# EAGLE board Schematic_-_Ebook_Reader_vFinal_v58 (EAGLE 9.7.0)
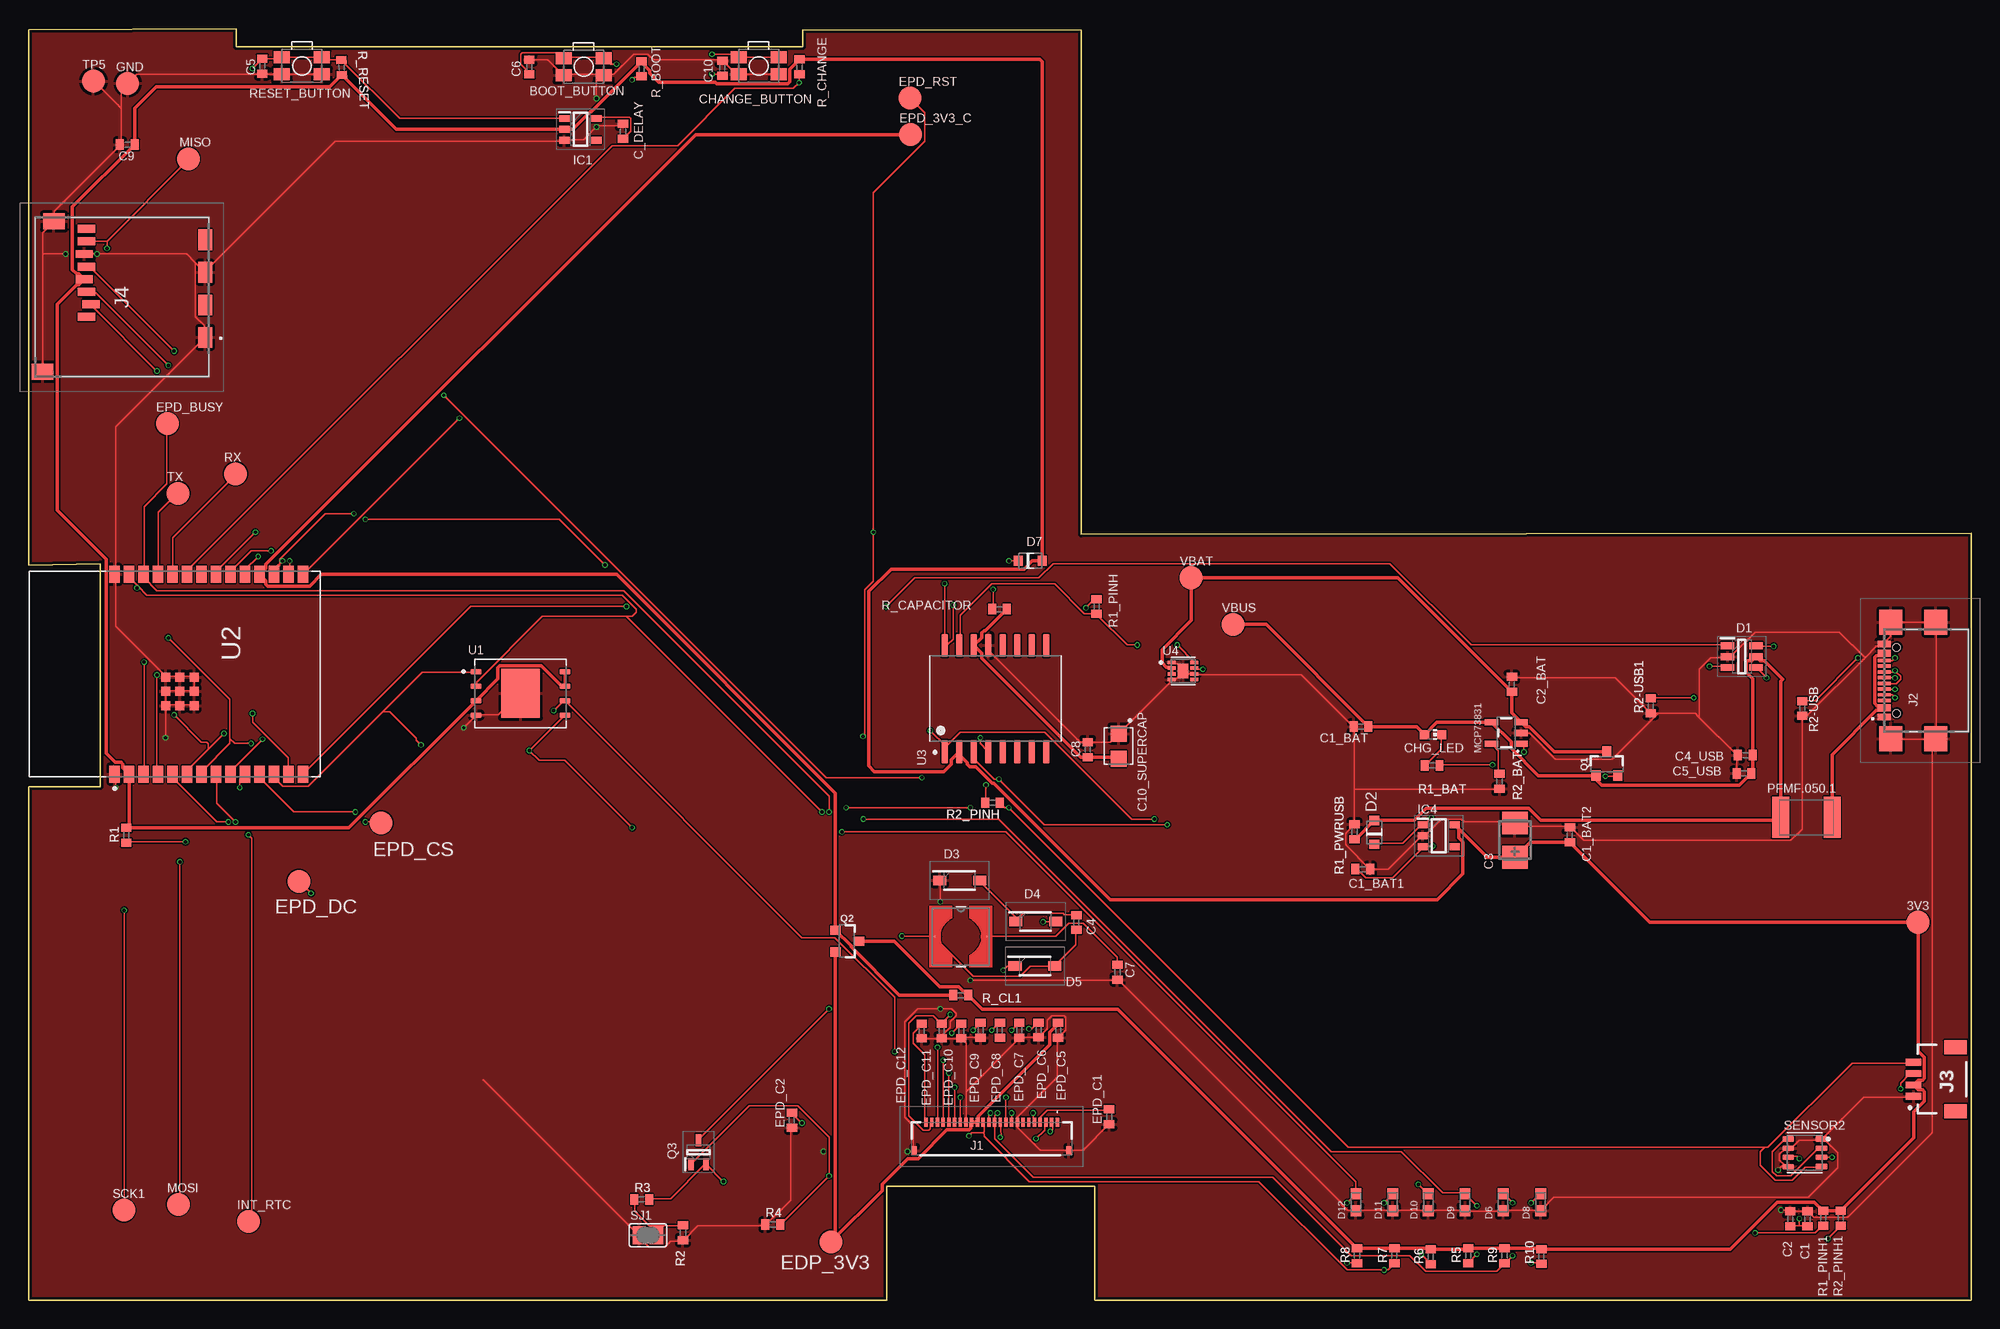
[diagram p0: board, top side]
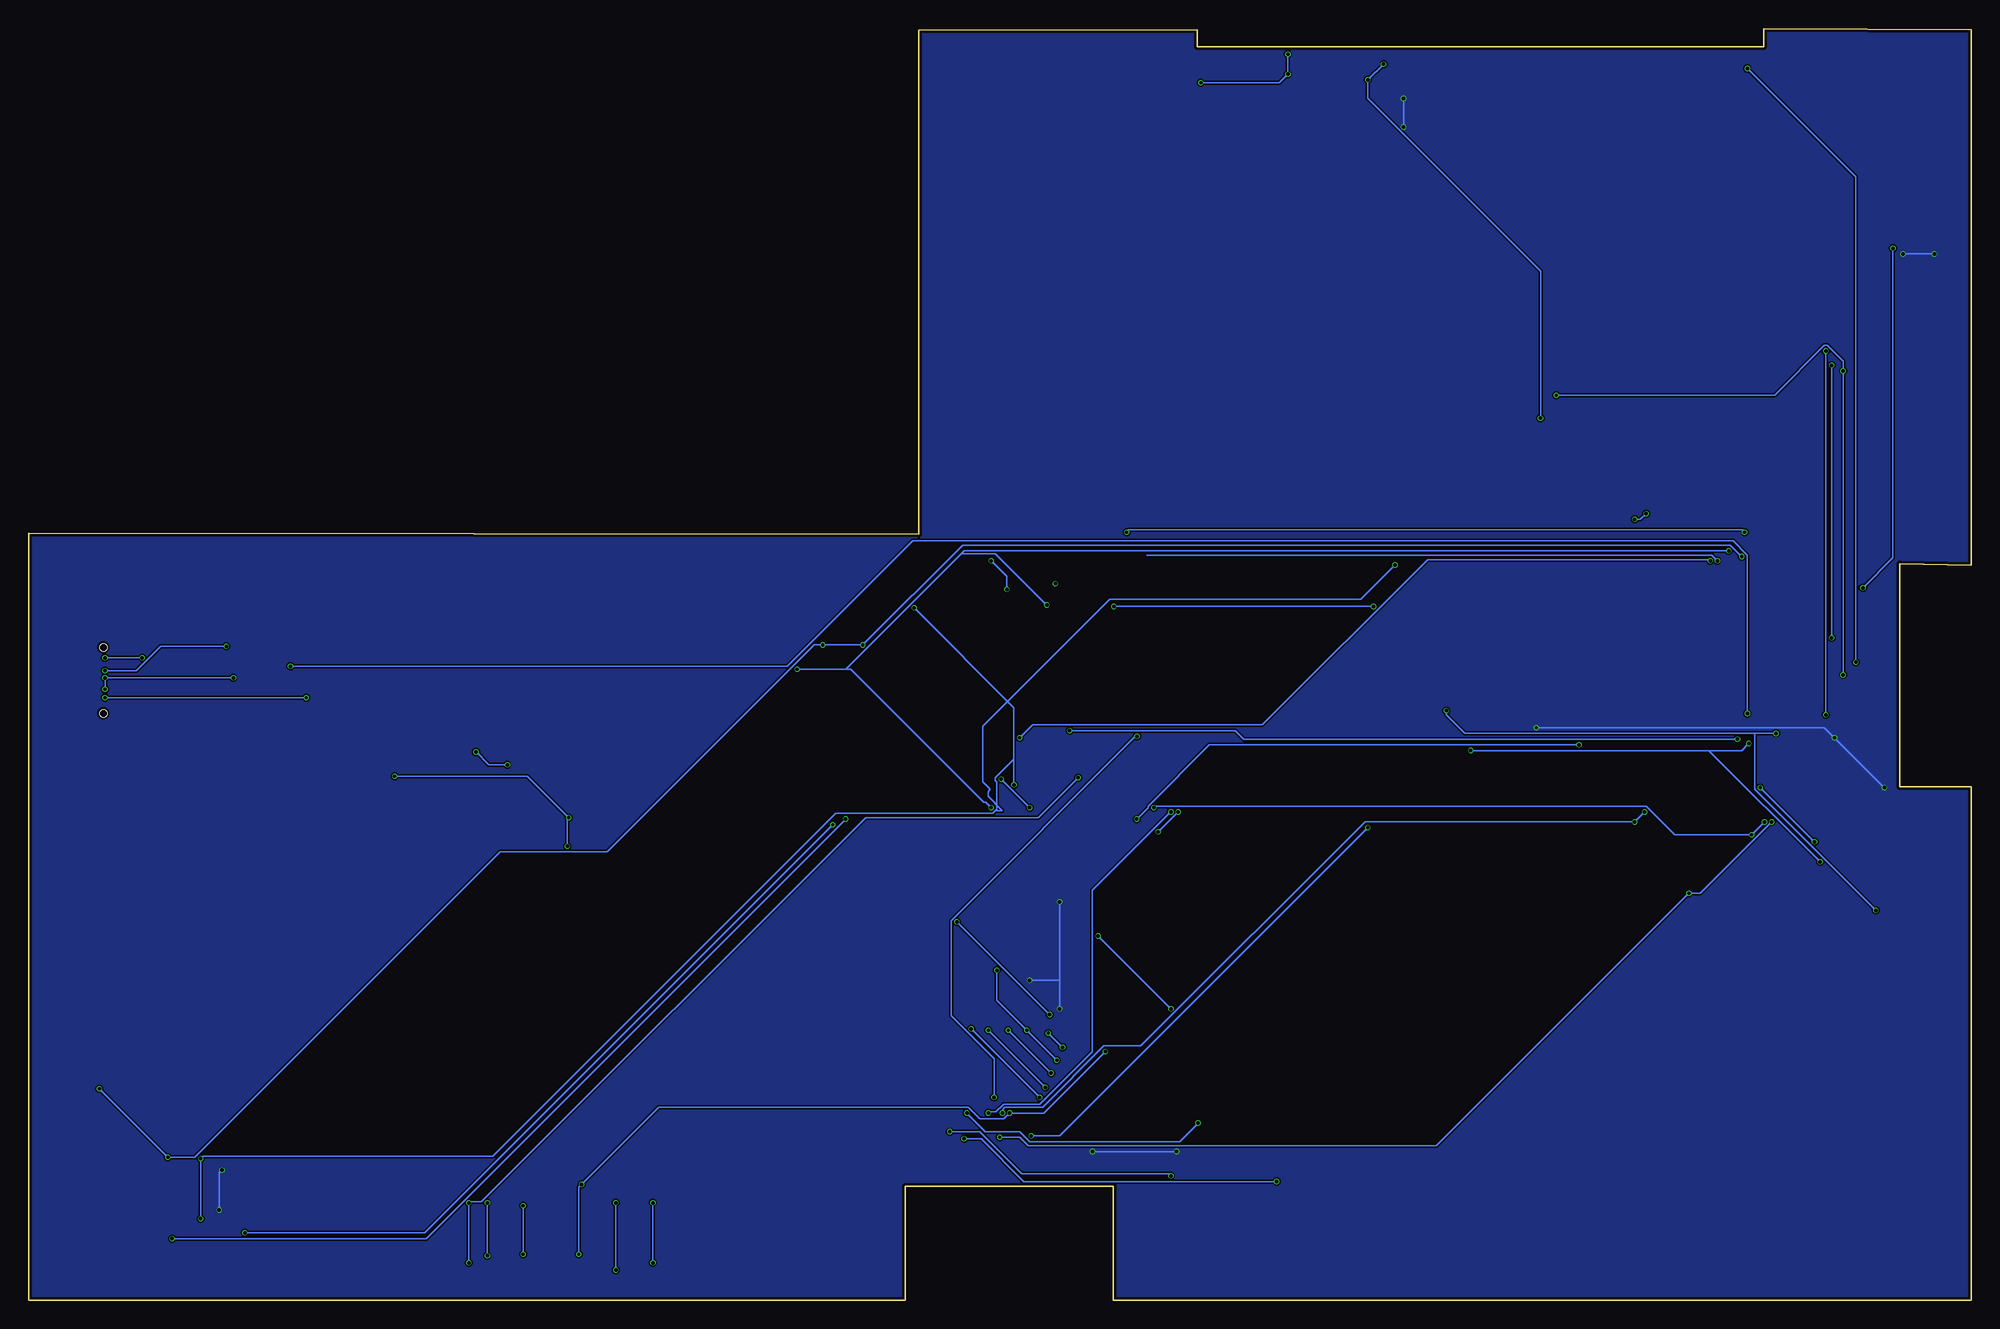
[diagram p1: board, bottom side, seen from below]

Size 170.2 x 111.4 mm. Coordinates in mm from the lower left corner, seen from the top.
Outline: 92.2,111.25 67.8,111.29 67.8,109.8 18.2,109.8 18.2,111.4 0,111.3 0,64.4 6.3,64.5 6.3,44.97 0,44.97 0,0 75.2,0 75.2,10 93.4,10 93.4,0 170.2,0 170.2,67.2 92.2,67.1 92.2,111.25
Copper layers (1*16): Top 0.035mm / dielectric 1.6mm / Bottom 0.035mm
Design rules "jlcpcb-2layers.dru *": minimum track width 5mil, minimum drill 0.3mm, track to track 5mil, track to pad 5mil, pad to pad 5mil, via to via 5mil, smd to smd 5mil, copper to edge 0.2mm, drill to drill 6mil, minimum pad ring 10mil, minimum via ring 3mil, stop-mask expansion 4mil, vias tented up to drill 0mil, thermal gap 10mil
Net classes: 0 default: width 0.15 mm; 1 POWER: width 0.3 mm

## Footprints (pad centres in the part's own frame; a part is rotated, then mirrored left to right if it is on the bottom)
TP20R = smd 2 x 2: TP 0,0
MYBUTTON = smd 1.4 x 1.05: 1 1.75,0.75; 2 -1.75,0.75; 3 -1.75,-0.75; 4 1.75,-0.75
EAGLE-LTSPICE_C0402 = smd 0.7 x 0.9: 1 -0.65,0; 2 0.65,0
RCL_CT3528 = smd 2 x 2.2: + -1.5,0; - 1.5,0
CAPCP3225X100N = smd 1.4 x 1.4: 1 -1.1,0; 2 1.1,0
ADAFRUIT_CHIP-LED0603 = smd 0.8 x 0.8: A 0,-0.75; C 0,0.75
SOT95P280X145-6N = smd 1.2 x 0.6: 1 -1.25,0.95; 2 -1.25,0; 3 -1.25,-0.95; 4 1.25,-0.95; 5 1.25,0; 6 1.25,0.95
ESP32_WROVER_AVX---SD0805S020S1R0_AVX_SD0805S020S1R0_0 = smd 0.8 x 0.9: 1 -1.05,0; 2 1.05,0
SOD3716X135N = smd 1.15 x 0.8: 1 -1.75,0; 2 1.75,0
DIOC1608X36N = smd 0.97 x 0.94: 1 -0.75,0; 2 0.75,0
SOT95P280X125-5N = smd 0.9 x 0.6: 1 -1.4,0.95; 2 -1.4,0; 3 -1.4,-0.95; 4 1.4,-0.95; 5 1.4,0.95
SOT95P280X120-5N = smd 0.9 x 0.6: 1 -1.4,0.95; 2 -1.4,0; 3 -1.4,-0.95; 4 1.4,-0.95; 5 1.4,0.95
FH34SRJ24S05SH99 = smd 0.3 x 0.8: 1 5.75,1.45; 2 5.25,1.45; 3 4.75,1.45; 4 4.25,1.45; 5 3.75,1.45; 6 3.25,1.45; 7 2.75,1.45; 8 2.25,1.45; 9 1.75,1.45; 10 1.25,1.45; 11 0.75,1.45; 12 0.25,1.45; 13 -0.25,1.45; 14 -0.75,1.45; 15 -1.25,1.45; 16 -1.75,1.45; 17 -2.25,1.45; 18 -2.75,1.45; 19 -3.25,1.45; 20 -3.75,1.45; 21 -4.25,1.45; 22 -4.75,1.45; 23 -5.25,1.45; 24 -5.75,1.45 | smd 0.4 x 0.8: MP1 6.75,-1.05; MP2 -6.75,-1.05
SAMACSYS_PARTS_USB4110GFA = smd 0.3 x 1.15: A1 -3.35,3.678; A4 -2.55,3.678; A5 -1.25,3.678; A6 -0.25,3.678; A7 0.25,3.678; A8 1.25,3.678; A9 2.55,3.678; A12 3.35,3.678; B1 3.05,3.678; B4 2.25,3.678; B5 1.75,3.678; B6 0.75,3.678; B7 -0.75,3.678; B8 -1.75,3.678; B9 -2.25,3.678; B12 -3.05,3.678 | smd 2.18 x 2: MP1 -5.11,-0.827; MP2 5.11,-0.827; MP3 -5.11,3.103; MP4 5.11,3.103 | hole 0.65: -2.89,2.603; 2.89,2.603
JST04_1MM_RA = smd 0.6 x 1.35: 1 -1.5,0; 2 -0.5,0; 3 0.5,0; 4 1.5,0 | smd 1.2 x 2: NC1 2.8,-3.675; NC2 -2.8,-3.675
112ATAARR03ATTEND = smd 1.8 x 1.2: G1 10.6,10.4; G2 4.9,10.4; S1 7.75,10.4; S2 2.05,10.4 | smd 1.4 x 1.9: G3 13.6,-3.85; G4 0.45,-2.85 | smd 0.7 x 1.5: P1 8.8,0; P2 7.7,0.4; P3 6.6,0; P4 5.5,-0.2; P5 4.4,0; P6 3.3,-0.2; P7 2.2,0; P8 1.1,0
IND_4828-WE-TPC_WRE = smd 0.127 x 0.127: 1 -2.286,0; 2 2.286,0
ESP32_WROVER_SPARKFUN-IC-POWER_SOT23-5 = smd 0.55 x 1.2: 1 -0.95,-1.3; 2 0,-1.3; 3 0.95,-1.3; 4 0.95,1.3; 5 -0.95,1.3
ESP32C6_VARISTOR_CT/CN1812 = smd 1.5 x 3.6: 1 -2.25,0; 2 2.25,0
ESP32_WROVER_SPARKFUN-DISCRETESEMI_SOT23-3 = smd 0.8 x 0.9: 1 -0.95,-1; 2 0.95,-1; 3 0,1.1
SOT65P210X110-3N = smd 1.05 x 0.5: 1 -1.05,0.65; 2 -1.05,-0.65; 3 1.05,0
ESP32_WROVER_EAGLE-LTSPICE_R0402 = smd 0.7 x 0.9: 1 -0.65,0; 2 0.65,0
ESP32_WROVER_BME680_PSON80P300X300X100-8N = smd 1.016 x 0.5: 1 1.458,1.2; 2 1.458,0.4; 3 1.458,-0.4; 4 1.458,-1.2; 5 -1.458,-1.22; 6 -1.458,-0.4; 7 -1.458,0.4; 8 -1.458,1.2
SJ = smd 1.168 x 1.6: 1 -0.762,0; 2 0.762,0
SON127P600X800X80-9N = smd 0.94 x 0.44: 1 -3.895,1.905; 2 -3.895,0.635; 3 -3.895,-0.635; 4 -3.895,-1.905; 5 3.895,-1.905; 6 3.895,-0.635; 7 3.895,0.635; 8 3.895,1.905 | smd 3.4 x 4.3: 9 0,0
XCVR_ESP32-C6-WROOM-1-N8 = smd 1.5 x 0.9: 1 -8.75,5.26; 2 -8.75,3.99; 3 -8.75,2.72; 4 -8.75,1.45; 5 -8.75,0.18; 6 -8.75,-1.09; 7 -8.75,-2.36; 8 -8.75,-3.63; 9 -8.75,-4.9; 10 -8.75,-6.17; 11 -8.75,-7.44; 12 -8.75,-8.71; 13 -8.75,-9.98; 14 -8.75,-11.25; 15 8.75,-11.25; 16 8.75,-9.98; 17 8.75,-8.71; 18 8.75,-7.44; 19 8.75,-6.17; 20 8.75,-4.9; 21 8.75,-3.63; 22 8.75,-2.36; 23 8.75,-1.09; 24 8.75,0.18; 25 8.75,1.45; 26 8.75,2.72; 27 8.75,3.99; 28 8.75,5.26 | smd 0.8 x 0.8: 29_1 -2.755,0.79; 29_2 -1.505,0.79; 29_3 -0.255,0.79; 29_4 -2.755,-0.46; 29_5 -1.505,-0.46; 29_6 -0.255,-0.46; 29_7 -2.755,-1.71; 29_8 -1.505,-1.71; 29_9 -0.255,-1.71
SOIC127P1032X265-16N = smd 2.05 x 0.59: 1 -4.655,4.445; 2 -4.655,3.175; 3 -4.655,1.905; 4 -4.655,0.635; 5 -4.655,-0.635; 6 -4.655,-1.905; 7 -4.655,-3.175; 8 -4.655,-4.445; 9 4.655,-4.445; 10 4.655,-3.175; 11 4.655,-1.905; 12 4.655,-0.635; 13 4.655,0.635; 14 4.655,1.905; 15 4.655,3.175; 16 4.655,4.445
SON50P200X200X80-9N = smd 0.76 x 0.27: 1 -0.985,0.75; 2 -0.985,0.25; 3 -0.985,-0.25; 4 -0.985,-0.75; 5 0.985,-0.75; 6 0.985,-0.25; 7 0.985,0.25; 8 0.985,0.75 | smd 0.9 x 1.3: 9 0,0

## Placement (x,y rotation side)
3V3  TPTP20R  [TP20R]  165.53,33.11 0 top
BOOT_BUTTON  BUTTON_CUSYOMV1  [MYBUTTON]  48.63,108.04 180 top
C1  100nF  [EAGLE-LTSPICE_C0402]  155.84,7.13 90 top
C1_BAT  4.7uF  [EAGLE-LTSPICE_C0402]  116.73,50.25 180 top
C1_BAT1  4.7uF  [EAGLE-LTSPICE_C0402]  116.88,37.77 0 top
C1_BAT2  4.7uF  [EAGLE-LTSPICE_C0402]  135.02,40.77 90 top
C2  100nF  [EAGLE-LTSPICE_C0402]  154.32,7.13 90 top
C2_BAT  4.7uF  [EAGLE-LTSPICE_C0402]  129.94,53.95 90 top
C3  100uF TANT  [RCL_CT3528]  130.21,40.3 90 top
C4  4.7uF/25V  [EAGLE-LTSPICE_C0402]  91.79,33.09 270 top
C4_USB  100nF  [EAGLE-LTSPICE_C0402]  150.39,47.75 180 top
C5  1uF  [EAGLE-LTSPICE_C0402]  20.47,108.11 270 top
C5_USB  4.7uF  [EAGLE-LTSPICE_C0402]  150.28,46.15 180 top
C6  100nF  [EAGLE-LTSPICE_C0402]  43.85,108.03 90 top
C7  10uF  [EAGLE-LTSPICE_C0402]  95.39,28.73 270 top
C8  100nF  [EAGLE-LTSPICE_C0402]  92.78,48.23 90 top
C9  100nF  [EAGLE-LTSPICE_C0402]  8.66,101.23 180 top
C10  100nF  [EAGLE-LTSPICE_C0402]  60.78,107.93 90 top
C10_SUPERCAP  CPH3225A  [CAPCP3225X100N]  95.49,48.54 270 top
C_DELAY  100nF  [EAGLE-LTSPICE_C0402]  52.07,102.39 90 top
CHANGE_BUTTON  BUTTON_CUSYOMV1  [MYBUTTON]  63.96,108.12 180 top
CHG_LED  [ADAFRUIT_CHIP-LED0603]  123.04,49.55 270 top
D1  USBLC6-2SC6Y  [SOT95P280X145-6N]  150.08,56.38 0 top
D2  ESP32_WROVER_AVX---SD0805S020S1R0_AVX_SD0805S020S1R0_0_0AVX_SD0805S020S1R0_0_0  [ESP32_WROVER_AVX---SD0805S020S1R0_AVX_SD0805S020S1R0_0]  117.89,40.98 90 top
D3  MBR0530  [SOD3716X135N]  81.56,36.77 0 top
D4  MBR0530  [SOD3716X135N]  88.22,33.18 0 top
D5  MBR0530  [SOD3716X135N]  88.16,29.28 0 top
D6  PGB1010603MR  [DIOC1608X36N]  129.18,8.57 90 top
D7  ESP32_WROVER_AVX---SD0805S020S1R0_AVX_SD0805S020S1R0_0_0AVX_SD0805S020S1R0_0_0  [ESP32_WROVER_AVX---SD0805S020S1R0_AVX_SD0805S020S1R0_0]  87.74,64.78 0 top
D8  PGB1010603MR  [DIOC1608X36N]  132.46,8.57 90 top
D9  PGB1010603MR  [DIOC1608X36N]  125.84,8.57 90 top
D10  PGB1010603MR  [DIOC1608X36N]  122.62,8.57 90 top
D11  PGB1010603MR  [DIOC1608X36N]  119.5,8.57 90 top
D12  PGB1010603MR  [DIOC1608X36N]  116.28,8.57 90 top
EDP_3V3  TPTP20R  [TP20R]  70.28,5.11 0 top
EPD_3V3_C  TPTP20R  [TP20R]  77.28,102.11 0 top
EPD_BUSY  TPTP20R  [TP20R]  12.17,76.79 0 top
EPD_C1  1uF_50V  [EAGLE-LTSPICE_C0402]  94.66,16.07 90 top
EPD_C2  1uF_50V  [EAGLE-LTSPICE_C0402]  66.87,15.77 90 top
EPD_C5  0.1uF_50V  [EAGLE-LTSPICE_C0402]  90.19,23.64 90 top
EPD_C6  1uF_50V  [EAGLE-LTSPICE_C0402]  88.48,23.67 90 top
EPD_C7  1uF_50V  [EAGLE-LTSPICE_C0402]  86.78,23.65 90 top
EPD_C8  1uF_50V  [EAGLE-LTSPICE_C0402]  85.09,23.65 90 top
EPD_C9  1uF_50V  [EAGLE-LTSPICE_C0402]  83.4,23.65 90 top
EPD_C10  1uF_50V  [EAGLE-LTSPICE_C0402]  81.71,23.59 90 top
EPD_C11  1uF_50V  [EAGLE-LTSPICE_C0402]  79.99,23.59 90 top
EPD_C12  1uF/50v  [EAGLE-LTSPICE_C0402]  78.25,23.59 90 top
EPD_CS  TPTP20R  [TP20R]  30.88,41.81 0 top
EPD_DC  TPTP20R  [TP20R]  23.69,36.69 0 top
EPD_RST  TPTP20R  [TP20R]  77.23,105.31 0 top
GND  TPTP20R  [TP20R]  8.67,106.59 0 top
IC1  BD5229G-TR  [SOT95P280X125-5N]  48.35,102.57 0 top
IC4  XC6220A331MR-G  [SOT95P280X120-5N]  123.53,40.69 0 top
INT_RTC  TPTP20R  [TP20R]  19.28,6.91 0 top
J1  FH34SRJ-24S-0.5SH_99_  [FH34SRJ24S05SH99]  84.37,14.14 0 top
J2  SAMACSYS_PARTS_USB4110-GF-A  [SAMACSYS_PARTS_USB4110GFA]  166.24,54.29 90 top
J3  QWIIC_RIGHT_ANGLE  [JST04_1MM_RA]  165.12,19.36 90 top
J4  112A-TAAR-R03_ATTEND  [112ATAARR03ATTEND]  5.08,94.95 270 top
L1  68uH  [IND_4828-WE-TPC_WRE]  81.67,31.85 0 top
MCP73831  ESP32_WROVER_SPARKFUN-IC-POWER_MCP73831  [ESP32_WROVER_SPARKFUN-IC-POWER_SOT23-5]  129.45,49.69 90 top
MISO  TPTP20R  [TP20R]  14.01,99.99 0 top
MOSI  TPTP20R  [TP20R]  13.13,8.39 0 top
PFMF.050.1  ESP32C6_VARISTORCN1812  [ESP32C6_VARISTOR_CT/CN1812]  155.74,42.3 180 top
Q1  20V/4.2A/52mΩ/1.4W  [ESP32_WROVER_SPARKFUN-DISCRETESEMI_SOT23-3]  138.26,46.96 0 top
Q2  20V/4.2A/52mΩ/1.4W  [ESP32_WROVER_SPARKFUN-DISCRETESEMI_SOT23-3]  71.68,31.46 270 top
Q3  SI1308EDL-T1-GE3  [SOT65P210X110-3N]  58.69,12.98 90 top
R1  10K  [ESP32_WROVER_EAGLE-LTSPICE_R0402]  8.55,40.73 90 top
R1_BAT  200  [ESP32_WROVER_EAGLE-LTSPICE_R0402]  122.95,46.85 0 top
R1_PINH  10K  [ESP32_WROVER_EAGLE-LTSPICE_R0402]  93.56,60.77 90 top
R1_PINH1  10K  [ESP32_WROVER_EAGLE-LTSPICE_R0402]  157.21,7.19 90 top
R1_PWRUSB  100K  [ESP32_WROVER_EAGLE-LTSPICE_R0402]  116.15,41.04 90 top
R2  2.2  [ESP32_WROVER_EAGLE-LTSPICE_R0402]  57.33,5.91 90 top
R2-USB  5k1  [ESP32_WROVER_EAGLE-LTSPICE_R0402]  155.38,51.83 270 top
R2-USB1  5k1  [ESP32_WROVER_EAGLE-LTSPICE_R0402]  142.1,52.07 90 top
R2_BAT  2K  [ESP32_WROVER_EAGLE-LTSPICE_R0402]  128.86,45.45 90 top
R2_PINH  10k  [ESP32_WROVER_EAGLE-LTSPICE_R0402]  84.44,43.57 180 top
R2_PINH1  10k  [ESP32_WROVER_EAGLE-LTSPICE_R0402]  158.75,7.19 90 top
R3  0.47  [ESP32_WROVER_EAGLE-LTSPICE_R0402]  53.71,8.83 0 top
R4  10K  [ESP32_WROVER_EAGLE-LTSPICE_R0402]  65.19,6.63 0 top
R5  10K  [ESP32_WROVER_EAGLE-LTSPICE_R0402]  126.11,3.91 90 top
R6  10K  [ESP32_WROVER_EAGLE-LTSPICE_R0402]  122.83,3.81 90 top
R7  10K  [ESP32_WROVER_EAGLE-LTSPICE_R0402]  119.65,3.91 90 top
R8  10K  [ESP32_WROVER_EAGLE-LTSPICE_R0402]  116.37,3.91 90 top
R9  10K  [ESP32_WROVER_EAGLE-LTSPICE_R0402]  129.29,3.91 90 top
R10  10K  [ESP32_WROVER_EAGLE-LTSPICE_R0402]  132.53,3.83 90 top
R_BOOT  10K  [ESP32_WROVER_EAGLE-LTSPICE_R0402]  53.71,107.87 90 top
R_CAPACITOR  15  [ESP32_WROVER_EAGLE-LTSPICE_R0402]  85.05,60.54 0 top
R_CHANGE  10K  [ESP32_WROVER_EAGLE-LTSPICE_R0402]  67.54,108.04 90 top
R_CL1  10k  [ESP32_WROVER_EAGLE-LTSPICE_R0402]  81.66,26.73 0 top
R_RESET  10K  [ESP32_WROVER_EAGLE-LTSPICE_R0402]  27.42,107.99 272 top
RESET_BUTTON  BUTTON_CUSYOMV1  [MYBUTTON]  23.95,108.12 180 top
RX  TPTP20R  [TP20R]  18.13,72.39 0 top
SCK1  TPTP20R  [TP20R]  8.35,7.89 0 top
SENSOR2  BME688  [ESP32_WROVER_BME680_PSON80P300X300X100-8N]  155.61,12.92 0 top
SJ1  [SJ]  54.26,5.69 0 top
TP5  TPTP20R  [TP20R]  5.69,106.79 0 top
TX  TPTP20R  [TP20R]  13.11,70.69 0 top
U1  W25Q512JVEIQ  [SON127P600X800X80-9N]  43.1,53.16 0 top
U2  ESP32-C6-WROOM-1-N8  [XCVR_ESP32-C6-WROOM-1-N8]  12.8,54.84 90 top
U3  DS3231SN#  [SOIC127P1032X265-16N]  84.7,52.7 90 top
U4  MAX17048G+T10  [SON50P200X200X80-9N]  101.14,55.12 0 top
VBAT  TPTP20R  [TP20R]  101.85,63.29 0 top
VBUS  TPTP20R  [TP20R]  105.53,59.21 0 top

## Library data of the parts
3V3 BOOT_BUTTON CHANGE_BUTTON CHG_LED EDP_3V3 EPD_3V3_C EPD_BUSY EPD_CS EPD_DC EPD_RST GND INT_RTC MISO MOSI PFMF.050.1 RESET_BUTTON RX SCK1 SJ1 TP5 TX VBAT VBUS = DeskAssistant v19 v1
C1 C1_BAT C1_BAT1 C1_BAT2 C2 C2_BAT C4 C4_USB C5 C5_USB C6-C10 C_DELAY EPD_C1 EPD_C2 EPD_C5-EPD_C12 = DeskAssistant v19 v1; SPICEMODEL: NONE; SPICEPREFIX: C
C3 = DeskAssistant v19 v1; SPICEPREFIX: C
C10_SUPERCAP = DeskAssistant v19 v1; AVAILABILITY: Not in stock; CHECK_PRICES: https://www.snapeda.com/parts/CPH3225A/Seiko+Instruments/view-part/?ref=eda; DESCRIPTION: 11 mF (EDLC) Supercapacitor 3.3 V 1210 (3225 Metric) - -; MF: Seiko Instruments; MP: CPH3225A; PACKAGE: 1210 Seiko; PRICE: None; PURCHASE-URL: https://www.snapeda.com/api/url_track_click_mouser/?unipart_id=562593&manufacturer=Seiko Instruments&part_name=CPH3225A&search_term=None; SNAPEDA_LINK: https://www.snapeda.com/parts/CPH3225A/Seiko+Instruments/view-part/?ref=snap
D1 = DeskAssistant v19 v1; AVAILABILITY: In Stock; CHECK_PRICES: https://www.snapeda.com/parts/USBLC6-2SC6Y/STMicroelectronics/view-part/?ref=eda; DESCRIPTION: 17V Clamp 5A (8/20µs) Ipp Tvs Diode Surface Mount SOT-23-6; MF: STMicroelectronics; MP: USBLC6-2SC6Y; PACKAGE: SOT-23-6 STMicroelectronics; PRICE: None; SNAPEDA_LINK: https://www.snapeda.com/parts/USBLC6-2SC6Y/STMicroelectronics/view-part/?ref=snap
D2 D7 = DeskAssistant v19 v1; CENTROID_NOT_SPECIFIED: No; DATASHEET: http://datasheets.avx.com/schottky.pdf; DIGIKEY_DESCRIPTION: DIODE SCHOTTKY 20V 1A 0805; DIGIKEY_PART_NUMBER: 478-7800-1-ND; LEAD_FREE: yes; MF: AVX; MOUSER_PART_NUMBER: 581-SD0805S020S1R0; PACKAGE: 0805 (2012 metric); PREFIX: D; ROHS: yes; TEMPERATURE_RANGE_HIGH: +125°C; TEMPERATURE_RANGE_LOW: -55°C
D3-D5 = DeskAssistant v19 v1; AVAILABILITY: In Stock; CHECK_PRICES: https://www.snapeda.com/parts/MBR0530/Onsemi/view-part/?ref=eda; DESCRIPTION: Diode Schottky 30 V 500mA Surface Mount SOD-123; MF: ON Semiconductor; MP: MBR0530; PACKAGE: SOD-123-2 ON Semiconductor; PRICE: None; PURCHASE-URL: https://www.snapeda.com/api/url_track_click_mouser/?unipart_id=179458&manufacturer=ON Semiconductor&part_name=MBR0530&search_term=None; SNAPEDA_LINK: https://www.snapeda.com/parts/MBR0530/Onsemi/view-part/?ref=snap
D6 D8-D12 = DeskAssistant v19 v1; AVAILABILITY: In Stock; CHECK_PRICES: https://www.snapeda.com/parts/PGB1010603MR/Littelfuse/view-part/?ref=eda; DESCRIPTION: 150V (Typ) Clamp - Ipp Tvs Diode Surface Mount 0603 (1608 Metric); MF: Littelfuse Inc.; MP: PGB1010603MR; PACKAGE: 0603 Littelfuse Inc.; PRICE: None; PURCHASE-URL: https://www.snapeda.com/api/url_track_click_mouser/?unipart_id=5659453&manufacturer=Littelfuse Inc.&part_name=PGB1010603MR&search_term=None; SNAPEDA_LINK: https://www.snapeda.com/parts/PGB1010603MR/Littelfuse/view-part/?ref=snap
IC1 = DeskAssistant v19 v1; DESCRIPTION: Voltage Detector with Adjustable Delay Time: CMOS processes are utilized to develop high precision, low current consumption CMOS reset ICs that allow arbitrary setting of the delay time. The extensive lineup includes both Nch Open Drain and CMOS output types in a wide range of detection voltages (from 2.3V to 6.0V, in 0.1V steps), enabling selection of the ideal solution based on customer requirements. In addition, the entire series is of course both lead-free and RoHS-compliant.; HEIGHT: 1.25mm; MANUFACTURER_NAME: ROHM Semiconductor; MANUFACTURER_PART_NUMBER: BD5229G-TR; MOUSER_PART_NUMBER: 755-BD5229G-TR; MOUSER_PRICE-STOCK: https://www.mouser.co.uk/ProductDetail/ROHM-Semiconductor/BD5229G-TR?qs=4kLU8WoGk0vvnhrrYwdszw%3D%3D
IC4 = DeskAssistant v19 v1; DESCRIPTION: LDO Voltage Regulators; HEIGHT: 1.2mm; MANUFACTURER_NAME: Torex; MANUFACTURER_PART_NUMBER: XC6220A331MR-G; MOUSER_PART_NUMBER: 865-XC6220A331MR-G; MOUSER_PRICE-STOCK: https://www.mouser.co.uk/ProductDetail/Torex-Semiconductor/XC6220A331MR-G?qs=AsjdqWjXhJ8ZSWznL1J0gg%3D%3D
J1 = DeskAssistant v19 v1; DESCRIPTION: 24 Position FFC, FPC Connector Contacts, Top and Bottom 0.020" (0.50mm) Surface Mount, Right Angle; HEIGHT: 1.1mm; MANUFACTURER_NAME: Hirose; MANUFACTURER_PART_NUMBER: FH34SRJ-24S-0.5SH(99); MOUSER_PART_NUMBER: 798-FH34SRJ24S05SH99; MOUSER_PRICE-STOCK: https://www.mouser.co.uk/ProductDetail/Hirose-Connector/FH34SRJ-24S-0.5SH99?qs=vcbW%252B4%252BSTIpKBl5ap9J8Fw%3D%3D
J2 = DeskAssistant v19 v1; DESCRIPTION: CONN USB 2.0 TYPE-C R/A SMT; HEIGHT: 3.26mm; MANUFACTURER_NAME: GCT (GLOBAL CONNECTOR TECHNOLOGY); MANUFACTURER_PART_NUMBER: USB4110-GF-A; MOUSER_PART_NUMBER: 640-USB4110-GF-A; MOUSER_PRICE-STOCK: https://www.mouser.co.uk/ProductDetail/GCT/USB4110-GF-A?qs=KUoIvG%2F9IlYiZvIXQjyJeA%3D%3D
J3 = DeskAssistant v19 v1; PROD_ID: CONN-13694
J4 = DeskAssistant v19 v1; DESCRIPTION: Micro SD Card Socket, Push-Push Type, Top Mount, SMT, H=1.83mm, 10u; HEIGHT: 1.9mm; MANUFACTURER_NAME: ATTEND; MANUFACTURER_PART_NUMBER: 112A-TAAR-R03 ATTEND
L1 = DeskAssistant v19 v1; COPYRIGHT: Copyright (C) 2024 Ultra Librarian. All rights reserved.; MANUFACTURER_PART_NUMBER: 744043680; MFR_NAME: Wurth Electronics
MCP73831 = DeskAssistant v19 v1; PROD_ID: IC-09995
Q1 Q2 = DeskAssistant v19 v1; PROD_ID: TRAN-14388
Q3 = DeskAssistant v19 v1; AVAILABILITY: In Stock; CHECK_PRICES: https://www.snapeda.com/parts/SI1308EDL-T1-GE3/Vishay+Siliconix/view-part/?ref=eda; DESCRIPTION: Si1308EDL-T1-GE3 N-channel MOSFET Transistor, 1.5 A, 30 V, 3-Pin SC-70 | Siliconix / Vishay SI1308EDL-T1-GE3; MF: Vishay Siliconix; MP: SI1308EDL-T1-GE3; PACKAGE: SOT-323 Vishay Semiconductor; PRICE: None; PURCHASE-URL: https://www.snapeda.com/api/url_track_click_mouser/?unipart_id=274603&manufacturer=Vishay Siliconix&part_name=SI1308EDL-T1-GE3&search_term=None; SNAPEDA_LINK: https://www.snapeda.com/parts/SI1308EDL-T1-GE3/Vishay+Siliconix/view-part/?ref=snap
R1 R1_BAT R1_PINH R1_PINH1 R1_PWRUSB R2 R2-USB R2-USB1 R2_BAT R2_PINH R2_PINH1 R3-R10 R_BOOT R_CAPACITOR R_CHANGE R_CL1 R_RESET = DeskAssistant v19 v1; SPICEMODEL: NONE; SPICEPREFIX: R
SENSOR2 = DeskAssistant v19 v1; AVAILABILITY: Unavailable; DESCRIPTION: Integrated Environmental Unit; MF: Bosch Sensortec; MP: BME680; PACKAGE: LGA-8 Bosch Tools; PRICE: None
U1 = DeskAssistant v19 v1; AVAILABILITY: In Stock; CHECK_PRICES: https://www.snapeda.com/parts/W25Q512JVEIQ/Winbond+Electronics/view-part/?ref=eda; DESCRIPTION: FLASH - NOR Memory IC 512Mb (64M x 8) SPI - Quad I/O 133 MHz 8-WSON (8x6); MF: Winbond Electronics; MP: W25Q512JVEIQ; PACKAGE: Package; PRICE: None; SNAPEDA_LINK: https://www.snapeda.com/parts/W25Q512JVEIQ/Winbond+Electronics/view-part/?ref=snap
U2 = DeskAssistant v19 v1; AVAILABILITY: In Stock; CHECK_PRICES: https://www.snapeda.com/parts/ESP32-C6-WROOM-1-N8/Espressif+Systems/view-part/?ref=eda; DESCRIPTION: Multiprotocol Modules ESP32-C6 module, Wi-Fi 6 in 2.4 GHz band, Bluetooth 5, Zigbee 3.0 and Thread. ESP34-WROOM Compatible - ENGINEERING SAMPLE; MF: Espressif Systems; MP: ESP32-C6-WROOM-1-N8; PACKAGE: None; PRICE: None; SNAPEDA_LINK: https://www.snapeda.com/parts/ESP32-C6-WROOM-1-N8/Espressif+Systems/view-part/?ref=snap
U3 = DeskAssistant v19 v1; AVAILABILITY: In Stock; CHECK_PRICES: https://www.snapeda.com/parts/DS3231SN%23/Analog+Devices/view-part/?ref=eda; DESCRIPTION: Extremely Accurate I²C-Integrated RTC/TCXO/Crystal; MF: Analog Devices; MP: DS3231SN#; PACKAGE: SOIC-16 Maxim; PRICE: None; PURCHASE-URL: https://www.snapeda.com/api/url_track_click_mouser/?unipart_id=99048&manufacturer=Analog Devices&part_name=DS3231SN#&search_term=None; SNAPEDA_LINK: https://www.snapeda.com/parts/DS3231SN%23/Analog+Devices/view-part/?ref=snap
U4 = DeskAssistant v19 v1; AVAILABILITY: In Stock; CHECK_PRICES: https://www.snapeda.com/parts/MAX17048G+T10/Analog+Devices/view-part/?ref=eda; DESCRIPTION: 3µA 1-Cell/2-Cell Fuel Gauge with ModelGauge; MF: Analog Devices; MP: MAX17048G+T10; PACKAGE: TDFN-8 Maxim; PRICE: None; PURCHASE-URL: https://www.snapeda.com/api/url_track_click_mouser/?unipart_id=329239&manufacturer=Analog Devices&part_name=MAX17048G+T10&search_term=None; SNAPEDA_LINK: https://www.snapeda.com/parts/MAX17048G+T10/Analog+Devices/view-part/?ref=snap

## Nets
3V3 [POWER]: 3V3.TP C1_BAT2.1 C3.+ C9.1 D7.2 IC1.2 IC4.5 J3.2 J4.P4 Q2.3 R1.2 R1_PINH1.2 R2_PINH1.2 R5.2 R6.2 R7.2 R8.2 R9.2 R10.2 R_BOOT.2 R_CHANGE.2 R_CL1.2 R_RESET.2 U1.3 U1.7 U1.8 U2.2 U3.2
32KHZ: R2_PINH1.1 U2.9 U3.1
DN: D1.4 J2.A7 J2.B7
DP: D1.6 J2.A6 J2.B6
EPD_3V3 [POWER]: EDP_3V3.TP EPD_C5.2 J1.15 J1.16 Q2.2
EPD_3V3_C [POWER]: EPD_3V3_C.TP Q2.1 R_CL1.1 U2.18
EPD_BUSY: EPD_BUSY.TP J1.9 U2.26
EPD_CS: D6.2 EPD_CS.TP J1.12 R9.1 U2.11
EPD_DC: EPD_DC.TP J1.11 U2.5
EPD_RST: EPD_RST.TP J1.10 U2.21
FLASH_CS: D9.2 R5.1 U1.1 U2.12
GDR: J1.2 Q3.1 R4.2
GND: BOOT_BUTTON.1 BOOT_BUTTON.2 C1.2 C1_BAT1.2 C1_BAT2.2 C1_BAT.2 C2.2 C2_BAT.2 C3.- C4_USB.2 C5.2 C5_USB.2 C6.2 C7.2 C8.2 C9.2 C10.2 C10_SUPERCAP.1 C_DELAY.2 CHANGE_BUTTON.1 CHANGE_BUTTON.2 D1.2 D3.1 D6.1 D8.1 D9.1 D10.1 D11.1 D12.1 EPD_C1.1 EPD_C2.1 EPD_C5.1 EPD_C6.1 EPD_C7.1 EPD_C9.1 EPD_C10.1 EPD_C11.1 EPD_C12.1 GND.TP IC1.3 IC4.2 J1.8 J1.17 J1.MP1 J1.MP2 J2.A1 J2.A12 J2.B1 J2.B12 J2.MP1 J2.MP2 J2.MP3 J2.MP4 J3.1 J4.G1 J4.G2 J4.G3 J4.G4 J4.P6 MCP73831.2 R1_PWRUSB.2 R2-USB1.1 R2-USB.2 R2.1 R2_BAT.1 R4.1 RESET_BUTTON.1 RESET_BUTTON.2 SENSOR2.1 SENSOR2.5 SENSOR2.7 SJ1.1 TP5.TP U1.4 U1.9 U2.1 U2.28 U2.29_1 U2.29_2 U2.29_3 U2.29_4 U2.29_5 U2.29_6 U2.29_7 U2.29_8 U2.29_9 U3.13 U4.1 U4.4 U4.6 U4.9
GPIO8: R1.1 U2.10
I2C_PW: C1.1 C2.1 R1_PINH.2 R2_PINH.2 SENSOR2.6 U2.17
INT_RTC: INT_RTC.TP R1_PINH1.1 U2.8 U3.3
IO/BOOT: BOOT_BUTTON.3 BOOT_BUTTON.4 C6.1 R_BOOT.1 U2.15
IO/CHANGE: C10.1 CHANGE_BUTTON.3 CHANGE_BUTTON.4 R_CHANGE.1 U2.23
MISO: D12.2 J4.P7 MISO.TP R8.1 U1.2 U2.27
MOSI: D11.2 J1.14 J4.P3 MOSI.TP R7.1 U1.5 U2.7
N$1: C1_BAT1.1 D2.1 IC4.1 IC4.3 Q1.2
N$2: EPD_C2.2 J1.5
N$3: J2.A5 R2-USB1.2
N$4: C7.1 L1.2
N$5: MCP73831.1 R1_BAT.2
N$6: CHG_LED.C R1_BAT.1
N$7: C4.1 D3.2 D4.1
N$8: MCP73831.5 R2_BAT.2
N$9: C_DELAY.1 IC1.5
N$10: D7.1 R_CAPACITOR.1
N$11: EPD_C1.2 J1.4
N$12: SENSOR2.2 SENSOR2.8
N$18: J2.B5 R2-USB.1
N$19: EPD_C6.2 J1.18
N$21: EPD_C7.2 J1.19
N$22: EPD_C8.2 J1.20
N$23: EPD_C10.2 J1.22
N$25: EPD_C12.2 J1.24
PREVGH: D5.1 EPD_C9.2 J1.21
PREVGL: D4.2 EPD_C11.2 J1.23
RESE: J1.3 Q3.2 R3.2
RESE': R2.2 R3.1 SJ1.2
RESET: C5.1 IC1.1 R_RESET.1 RESET_BUTTON.3 RESET_BUTTON.4 U2.3
RTC_RST: U2.16 U3.4
RX: RX.TP U2.24
SCK: D10.2 J1.13 J4.P5 R6.1 SCK1.TP U1.6 U2.6
SCL: J3.4 R2_PINH.1 SENSOR2.4 U2.20 U3.16 U4.7
SDA: J3.3 R1_PINH.1 SENSOR2.3 U2.19 U3.15 U4.8
SRC: C4.2 D5.2 L1.1 Q3.3
SS_SD: D8.2 J4.P2 R10.1 U2.4
TX: TX.TP U2.25
USB_D+: D1.1 U2.14
USB_D-: D1.3 U2.13
VBAT [POWER]: C2_BAT.1 MCP73831.3 Q1.3 U4.2 U4.3 VBAT.TP
VBUS [POWER]: C1_BAT.1 C4_USB.1 C5_USB.1 CHG_LED.A D1.5 D2.2 MCP73831.4 PFMF.050.1.2 Q1.1 R1_PWRUSB.1 VBUS.TP
VRTC [POWER]: C8.1 C10_SUPERCAP.2 R_CAPACITOR.2 U3.14
VUSB [POWER]: J2.A4 J2.A9 J2.B4 J2.B9 PFMF.050.1.1

## Tracks (layer width: path | path; a pad name or v marks a point on that pad's centre or on a via)
3V3
  Top 0.3: U1.8 U1.7 46.71,53.8 44.91,55.59 41.28,55.59 41.12,55.42 41.12,54.44 U1.3 28.06,41.38 R1.2 8.81,41.64 U2.2 8.27,46.63 8.27,46.95 8.11,47.12 7.58,47.12 6.8,47.9 6.8,64.9 2.5,69.2 2.5,87.27 4.21,88.98 4.4,88.98 J4.P4 4.4,89.92 4.21,89.92 3.85,90.29 3.85,95.77 C9.1 9.31,104.41 11.2,106.3 26.4,106.3 R_RESET.2 32.22,102.57 IC1.2 47.66,102.57 49.19,104.1 49.28,104.1 R_BOOT.2 53.71,108.41 54.43,107.69 54.43,107.47 55.2,106.7 60.17,106.7 60.3,106.57 66.53,106.57 66.69,106.73 66.69,107.84 R_CHANGE.2 88.6,108.7 88.79,108.51 D7.2 87.93,64.78 87.2,64.05 75.55,64.05 73.6,62.1 73.6,46.8 74.1,46.3 80.18,46.3 80.83,46.95 80.83,47.35 U3.2 81.53,47.8 82.23,47.1 82.23,46.95 82.43,46.74 82.98,46.74 84.43,45.3 84.55,45.3 94.75,35.1 123.4,35.1 125.66,37.36 125.66,40.16 125.28,40.53 125.28,41.29 | Q2.3 75.84,31.46 79.84,27.46 81.47,27.46 82.2,26.73 R_CL1.2 83.54,25.5 95.43,25.5 R8.2 R7.2 122.73,4.56 R6.2 126.01,4.46 R5.2 R9.2 132.45,4.56 R10.2 149.08,4.48 153.2,8.6 156.45,8.6 R1_PINH1.2 R2_PINH1.2 165.12,14.21 165.12,16.49 166.08,17.45 166.08,18.27 165.91,18.44 165.55,18.44 J3.2 165.55,19.28 165.91,19.28 166.08,19.45 166.08,21.27 165.53,21.82 3V3.TP 142.03,33.11 C1_BAT2.1 131.53,40.12 C3.+ 127.77,38.8 125.28,41.29 | 125.28,41.29 IC4.5
32KHZ  (via drill 0.3)
  Top 0.15: v157.62,5.4 158.75,6.53 R2_PINH1.1 | v98.62,42.15 96.62,42.15 89,49.77 81.62,49.77 80.38,48.52 | 80.38,48.52 80.38,48.15 U3.1 80.38,48.52 | v20.5,49.15 17.75,46.4 17.75,46.15 U2.9 | 80.38,48.52 v79,49.9
  Bottom 0.15: v157.62,5.4 135.38,5.4 v98.62,42.15 | v20.5,49.15 63.75,49.15 64.5,49.9 v79,49.9
DN  (via drill 0.3)
  Top 0.15: v163.5,53.52 162.62,53.52 J2.B7 | v163.5,54.52 162.62,54.52 J2.A7 | v152.25,54.52 151.38,55.4 D1.4
  Bottom 0.15: v163.5,53.52 v163.5,54.52 v152.25,54.52
DP  (via drill 0.3)
  Top 0.15: 163.5,55.02 162.62,55.02 J2.B6 | 163.5,55.02 163.62,55.02 164,54.65 164,54.4 163.62,54.02 162.62,54.02 J2.A6 | v152.88,57.27 151.38,57.27 D1.6 | 163.5,55.02 v163.5,55.15
  Bottom 0.15: v152.88,57.27 158.62,57.27 160.75,55.15 v163.5,55.15
EPD_3V3
  Top 0.3: Q2.2 70.68,5.51 EDP_3V3.TP 74.77,9.6 74.77,10.18 77.01,12.41 77.94,12.41 80.44,14.91 82.39,14.91 82.55,15.07 82.55,15.52 J1.16 J1.15 83.19,15.66 83.19,16.11 89.46,22.38 89.46,23.45 90.19,24.18 EPD_C5.2
EPD_3V3_C
  Top 0.3: EPD_3V3_C.TP 70.41,102.11 70.4,102.1 58.43,102.1 20.78,64.45 20.78,64.13 U2.18 20.78,63.05 20.78,62.73 20.95,62.56 24.61,62.56 25.64,63.59 51.51,63.59 70.68,44.42 Q2.1 72.05,31.04 72.05,30.95 76.27,26.73 R_CL1.1
EPD_BUSY  (via drill 0.3)
  Top 0.15: v86.12,16.4 86.12,15.65 J1.9 | v70.12,42.77 70.12,44.15 52.12,62.15 11.25,62.15 10.12,63.27 10.12,63.52 U2.26 10.12,63.65 10.12,69.53 12.12,71.53 12.12,76.78 EPD_BUSY.TP
  Bottom 0.15: v70.12,42.77 77,35.9 77,21.77 81.6,17.18 84.79,17.18 85.47,16.5 86.03,16.5 v86.12,16.4
EPD_CS  (via drill 0.3)
  Top 0.15: v28.62,42.77 23.25,42.77 20.25,45.77 20.25,46.02 U2.11 | v29.5,41.9 30.88,41.9 EPD_CS.TP | v130,8.53 129.25,9.28 D6.2 | v130,3.9 129.38,3.28 R9.1 129.25,3.15 128.62,2.53 122.38,2.53 121,3.9 115.88,3.9 109,10.78 88,10.78 84.62,14.15 84.62,15.53 J1.12 84.62,15.65 84.62,16.15 v84.88,16.4
  Bottom 0.15: v28.62,42.77 v29.5,41.9 53.12,41.9 72.75,22.27 76,22.27 81.38,16.9 84.67,16.9 84.88,16.7 v84.88,16.4 | v130,3.9 v130,8.53
EPD_DC  (via drill 0.3)
  Top 0.15: v85.12,14.28 85.21,14.36 J1.11 | v24.75,35.65 23.75,36.65 EPD_DC.TP | v17.5,41.9 16.5,41.9 12.62,45.77 12.62,46.02 U2.5
  Bottom 0.15: v85.12,14.28 83.38,14.28 82.62,13.53 46.88,13.53 v24.75,35.65 23.75,35.65 v17.5,41.9
EPD_RST  (via drill 0.3)
  Top 0.15: v85.62,17.77 85.62,15.65 J1.10 | EPD_RST.TP 77.25,105.28 78.5,104.03 78.5,101.53 74,97.03 v74,67.28 74,63 73.25,62.25 73.25,49.55 v73.1,49.4 | v19.88,67.28 16.5,63.9 16.5,63.65 U2.21
  Bottom 0.15: v85.62,17.77 85.62,21.15 89.38,24.9 89.38,33.26 73.23,49.4 v73.1,49.4 | v74,67.28 73.8,67.48 20.07,67.48 v19.88,67.28
FLASH_CS  (via drill 0.3)
  Top 0.15: v126.88,4.03 R5.1 | v126.88,8.28 125.88,9.28 D9.2 125.75,9.4 123.88,9.4 120.25,13.03 114.12,13.03 85,42.15 v73.12,42.15 | U1.1 39.12,55.02 34.5,55.02 31.04,51.56 24.5,45.02 22.25,45.02 21.62,45.65 21.62,46.02 U2.12 | 33.98,49.25 33.98,49.05 v34.38,48.65
  Top 0.152: 33.98,49.25 31.66,51.56 31.04,51.56
  Bottom 0.15: v126.88,8.28 v126.88,4.03 | v73.12,42.15 72.12,43.15 72.12,43.27 66.75,48.65 v34.38,48.65
GDR  (via drill 0.3)
  Top 0.15: v89.5,14.78 89.7,14.98 89.7,15.51 J1.2 | v70.12,10.9 65.88,6.65 R4.2 | 70.12,11.2 70.12,14.28 67.38,17.02 63.12,17.02 58.12,12.03 Q3.1
  Top 0.152: 70.12,11.2 v70.12,10.9
  Bottom 0.15: v89.5,14.78 86.88,14.78 83.2,11.1 70.33,11.1 v70.12,10.9
GND  (via drill 0.3)
  Top 0.15: U1.9 43,53.15 41.12,51.27 39.25,51.27 U1.4 39.12,51.15 v38.12,50.15 | U2.29_1 12,52.15 12,53.27 U2.29_2 12.12,53.4 13.25,53.4 U2.29_5 13.38,53.4 14.5,53.4 | U2.29_1 12.12,52.15 13.25,52.15 U2.29_4 13.38,52.15 14.5,52.15 U2.29_7 | v7.62,44.9 7.62,46.02 U2.1 | v12,49.27 12,52.02 U2.29_1 | 14.5,53.4 14.5,54.52 U2.29_9 14.5,54.65 13.38,54.65 U2.29_6 13.25,54.65 12.12,54.65 U2.29_3 12,54.65 7.62,59.02 7.62,63.52 U2.28 7.62,63.65 7.62,76.53 15.38,84.28 J4.G1 15.38,84.4 15.38,85.4 14.62,86.15 14.62,90.9 | 14.5,53.4 U2.29_8 | 1.25,91.65 1.25,93.53 2.12,94.4 J4.G4 2.25,94.53 2.25,95.4 8,101.15 C9.2 8.12,101.28 8.12,104.4 | 1.25,91.65 1.25,81.4 J4.G3 | RESET_BUTTON.2 25.62,107.4 22.25,107.4 RESET_BUTTON.1 22.12,107.4 20.5,107.4 C5.2 20.38,107.4 9.5,107.4 8.75,106.65 GND.TP 8.62,106.53 8.12,106.03 8.12,104.4 | 8.12,104.4 5.75,106.78 TP5.TP | CHANGE_BUTTON.2 65.62,107.4 62.25,107.4 CHANGE_BUTTON.1 62.12,107.28 60.88,108.53 C10.2 60.75,108.65 54.75,108.65 54.25,109.15 53,109.15 51.25,107.4 50.5,107.4 BOOT_BUTTON.2 | C6.2 43.88,108.65 45.5,108.65 46.88,107.28 BOOT_BUTTON.1 47,107.4 49.75,107.4 | 49.75,107.4 50.38,107.4 BOOT_BUTTON.2 | C_DELAY.2 52,103.03 51.88,102.9 49.88,102.9 v49.75,102.78 48.62,101.65 47,101.65 IC1.3 46.88,101.53 26.88,101.53 15.5,90.15 J4.G2 15.38,90.15 14.62,90.9 | J4.P6 v6,91.65 13.88,91.65 14.62,90.9 | v49.75,105.28 49.75,107.4 | 49.75,107.4 BOOT_BUTTON.2 | v3.25,91.65 1.25,91.65 | J2.B12 162.62,51.15 162.62,51.02 J2.A1 162.62,50.9 162.62,49.77 163.12,49.27 J2.MP3 163.25,49.15 166.75,49.15 | 166.75,49.15 167,49.15 J2.MP1 | 160.88,56.27 161.88,57.27 162.5,57.27 J2.B1 162.62,57.4 162.62,57.52 J2.A12 162.62,57.65 163.12,58.15 163.12,59.4 J2.MP4 J2.MP2 167.12,59.4 167.12,49.27 J2.MP1
  Top 0.15: 160.88,56.27 155.88,51.27 155.5,51.27 R2-USB.2 155.38,51.15 155.38,41.27 154.38,40.27 136.25,40.27 135.12,41.4 C1_BAT2.2 135,41.52 130.5,41.52 130.25,41.77 C3.- 130.12,41.9 125.75,41.9 125.5,42.15 123.75,42.15 122.25,40.65 IC4.2 122.12,40.77 119.12,37.77 117.62,37.77 C1_BAT1.2 117.5,37.77 115.38,39.9 115.38,40.9 116.12,41.65 R1_PWRUSB.2 116.12,41.77 116.12,44.77 | C5_USB.2 149.62,47.65 C4_USB.2 149.62,47.77 146.38,51.02 | 142.75,51.4 146,51.4 146.38,51.02 | 142.75,51.4 142.12,51.4 R2-USB1.1 142,51.52 139,54.52 130,54.52 C2_BAT.2 | 142.75,51.4 138.75,47.4 133.75,47.4 131.5,49.65 130.88,49.65 MCP73831.2 | 146.38,51.02 146.38,55.27 147.38,56.27 148.75,56.27 D1.2 148.88,56.4 149.12,56.4 151.25,58.52 158.62,58.52 160.88,56.27 | 101,54.9 101.12,55.02 U4.9 | 101,54.9 100.5,54.4 100.25,54.4 U4.4 100.12,54.27 C10_SUPERCAP.1 94.75,48.9 92.88,48.9 C8.2 92.75,48.9 92.12,48.9 84.12,56.9 84.12,57.27 U3.13 | U4.1 100.25,55.77 100.62,55.77 101.25,55.15 U4.9 | 101,54.9 102.12,54.9 U4.6 102.12,54.77 111.5,54.77 116,50.27 C1_BAT.2 116.12,50.15 116.12,44.77 | 101,54.9 U4.9 | 116.12,44.77 128.75,44.77 R2_BAT.1 | EPD_C2.1 66.75,15.03 66.75,8.78 64.62,6.65 R4.1 64.5,6.53 58.62,6.53 57.38,5.28 R2.1 57.25,5.15 56.25,5.15 55.75,4.65 54.38,4.65 53.38,5.65 SJ1.1 53.38,5.78 39.83,19.32 | EPD_C1.1 94.62,15.4 92.38,13.15 91.12,13.15 J1.MP1 91,13.15 88.62,13.15 86.62,15.15 86.62,15.53 J1.8 86.62,15.65 86.62,16.02 90.12,19.52 90.12,22.9 EPD_C5.1 90.25,23.02 90.88,23.65 90.88,24.77 90.75,24.9 89.62,24.9 89.25,24.52 89.25,23.77 88.5,23.02 EPD_C6.1 88.38,23.02 86.88,23.02 EPD_C7.1 86.75,22.9 82.12,18.27
  Top 0.15: 82.12,18.27 82.12,22.52 EPD_C10.1 | 82.12,18.27 82.12,15.65 J1.17 | EPD_C9.1 83.38,23.02 81.75,23.02 EPD_C10.1 | EPD_C11.1 79.88,23.02 80.75,23.9 80.75,24.4 81.25,24.9 81.25,25.15 80.88,25.52 v79.88,25.52 77.88,25.52 76.75,24.4 76.75,16.02 77.5,15.28 77.5,13.15 J1.MP2 77.5,13.03 v77,13.03 | EPD_C12.1 78.25,22.9 79.88,22.9 EPD_C11.1 | v79.88,34.9 79.88,36.65 D3.1 | EPD_C10.1 81.62,22.9 80,22.9 EPD_C11.1 | 153.75,11.9 153.38,12.28 153.38,12.78 153.88,13.28 154.12,13.28 SENSOR2.7 154.25,13.4 154.5,13.4 155.12,14.03 157,14.03 SENSOR2.1 | 153.75,11.9 153.88,11.78 154.12,11.78 SENSOR2.5 153.75,11.9 | J3.1 165.12,17.77 160.75,17.77 157.12,14.15 SENSOR2.1 | v153.5,7.9 154.25,7.9 C2.2 154.38,7.78 155.75,7.78 C1.2 155.88,7.78 156.38,7.28 159.38,7.28 166.75,14.65 166.75,49.15 | 153.75,11.9 v153.25,11.4 | 119.5,7.9 122.5,7.9 D10.1 122.62,7.9 125.75,7.9 D9.1 125.88,7.78 129.12,7.78 D6.1 129.25,7.9 132.38,7.9 D8.1 132.5,7.9 133.62,9.03 155.9,9.03 158.5,11.62 158.5,12.9 157.38,14.03 157.12,14.03 SENSOR2.1 | 119.5,7.9 116.38,7.9 D12.1 116.25,7.9 115.5,7.9 115,8.4 115,8.53 95.5,28.02 C7.2 95.38,28.02 v82.5,28.02 | 119.5,7.9 D11.1 | 166.75,49.15 J2.MP1
  Bottom 0.15: v7.62,44.9 v12,49.27 12.88,50.15 v38.12,50.15 | v49.75,102.78 v49.75,105.28 | v6,91.65 v3.25,91.65 | v79.88,25.52 79.88,28.02 | 79.88,28.02 v79.88,34.9 | v77,13.03 v69.62,13.03 | v153.5,7.9 153.5,11.15 v153.25,11.4 | v82.5,28.02 79.88,28.02
  pour Top: 75.16,10.06 75.18,10.08 93.42,10.08 93.44,10.06 93.46,10.04 93.48,10.02 93.48,0.08 170.12,0.08 170.12,67.12 92.22,67.02 92.22,67.02 92.2,67.02 92.18,67.02 92.18,67.02 92.18,67.02 92.17,67.03 92.16,67.04 92.16,67.04 92.16,67.04 92.15,67.05 92.14,67.06 92.14,67.06 92.14,67.06 92.13,67.07 92.12,67.08 92.12,67.08 92.12,67.08 92.12,67.1 92.12,67.12 92.12,67.12 92.12,111.22 67.88,111.22 67.88,109.78 67.86,109.76 67.84,109.74 67.82,109.72 18.18,109.72 18.16,109.74 18.14,109.76 18.12,109.78 18.12,111.32 0.08,111.22 0.08,64.48 6.28,64.58 6.28,64.58 6.3,64.58 6.31,64.58 6.31,64.58 6.32,64.58 6.33,64.57 6.34,64.57 6.34,64.56 6.34,64.56 6.35,64.55 6.36,64.54 6.36,64.54 6.36,64.54 6.37,64.53 6.38,64.52 6.38,64.52 6.38,64.52 6.38,64.5 6.38,64.49 6.38,64.49 6.38,44.98 6.36,44.96 6.34,44.94 6.32,44.92 0.08,44.92 0.08,0.08 75.12,0.08 75.12,10.02 75.14,10.04
  pour Bottom: 75.16,10.06 75.18,10.08 93.42,10.08 93.44,10.06 93.46,10.04 93.48,10.02 93.48,0.08 170.12,0.08 170.12,67.12 92.22,67.02 92.22,67.02 92.2,67.02 92.18,67.02 92.18,67.02 92.18,67.02 92.17,67.03 92.16,67.04 92.16,67.04 92.16,67.04 92.15,67.05 92.14,67.06 92.14,67.06 92.14,67.06 92.13,67.07 92.12,67.08 92.12,67.08 92.12,67.08 92.12,67.1 92.12,67.12 92.12,67.12 92.12,111.22 67.88,111.22 67.88,109.78 67.86,109.76 67.84,109.74 67.82,109.72 18.18,109.72 18.16,109.74 18.14,109.76 18.12,109.78 18.12,111.32 0.08,111.22 0.08,64.48 6.28,64.58 6.28,64.58 6.3,64.58 6.31,64.58 6.31,64.58 6.32,64.58 6.33,64.57 6.34,64.57 6.34,64.56 6.34,64.56 6.35,64.55 6.36,64.54 6.36,64.54 6.36,64.54 6.37,64.53 6.38,64.52 6.38,64.52 6.38,64.52 6.38,64.5 6.38,64.49 6.38,64.49 6.38,44.98 6.36,44.96 6.34,44.94 6.32,44.92 0.08,44.92 0.08,0.08 75.12,0.08 75.12,10.02 75.14,10.04
  pour Top: 52.14,60.16 71.23,41.08 86.32,41.08 86.34,41.06 114,13.41 114.06,13.46 114.08,13.48 152.17,13.48 159.26,20.56 159.28,20.58 165.92,20.58 165.54,20.96 165.52,20.98 165.52,32.92 141.98,32.92 141.96,32.94 134.9,39.99 134.84,39.94 134.82,39.92 131.73,39.92 131.38,39.57 131.38,38.98 131.36,38.96 130.94,38.54 130.92,38.52 127.68,38.52 127.66,38.54 125.48,40.72 125.48,36.78 125.46,36.76 123.94,35.24 123.92,35.22 94.68,35.22 94.66,35.24 88.84,41.06 88.82,41.08 88.82,41.52 88.84,41.54 88.96,41.66 88.98,41.68 99.42,41.68 98.77,42.32 96.68,42.32 96.66,42.34 89.17,49.82 81.78,49.82 81.76,49.84 81.75,49.84 80.81,48.9 80.96,48.74 80.98,48.72 80.98,46.88 80.96,46.86 80.14,46.04 80.12,46.02 74.18,46.02 74.16,46.04 73.44,46.76 73.42,46.78 73.42,49.07 72.94,49.56 72.92,49.58 72.92,61.72 72.94,61.74 75.56,64.36 75.58,64.38 87.07,64.38 87.76,65.06 87.78,65.08 88.42,65.08 88.42,108.37 88.37,108.42 68.28,108.42 68.28,106.88 68.26,106.86 67.84,106.44 67.82,106.42 56.73,106.42 14.84,64.54 14.82,64.52 14.38,64.52 14.36,64.54 14.27,64.62 6.58,64.62 6.58,45.53 7.03,45.08 8.72,45.08 8.74,45.06 8.76,45.04 8.78,45.02 8.78,41.53 8.93,41.38 28.07,41.38 40.92,54.23 40.92,56.12 40.94,56.14 44.96,60.16 44.98,60.18 52.12,60.18
  pour Top: 78.76,64.54 78.78,64.52 78.78,56.88 91.67,56.88 93.72,58.93 93.72,65.77 92.87,66.62 78.13,66.62 77.41,65.9 77.55,65.76 78.54,64.97 78.54,64.96 78.55,64.96 78.56,64.95 78.56,64.95 78.56,64.94 78.57,64.93 78.57,64.92 78.57,64.92 78.58,64.92 78.58,64.9 78.58,64.89 78.58,64.89 78.58,64.88 78.57,64.87 78.57,64.86 78.57,64.86 78.56,64.86 78.56,64.85 78.55,64.84 78.55,64.84 78.54,64.84 78.53,64.83 78.52,64.83 78.52,64.83 78.52,64.82 78.5,64.82 78.49,64.82 78.49,64.82 78.48,64.82
  pour Top: 74.16,10.36 74.18,10.38 99.42,10.38 99.44,10.36 108.63,1.18 139.62,1.18 139.62,4.12 139.64,4.14 140.82,5.32 124.48,5.32 124.46,5.34 89.87,39.92 53.08,39.92 53.08,5.38 53.06,5.36 51.08,3.38 67.17,3.38
  pour Top: 53.02,40.08 106.87,40.08 127.99,61.2 123.37,65.82 77.73,65.82 52.33,40.42
  pour Top: 9.66,70.04 9.68,70.02 9.68,59.93 10.73,58.88 19.67,58.88 21.62,60.83 21.62,73.57 19.27,75.92 5.21,75.92 4.05,75.66
  pour Top: 71.02,98.53 71.02,108.42 18.88,108.42 18.86,108.44 17.98,109.32 17.98,102.23 22.83,97.38 69.87,97.38
  pour Bottom: 85.26,11.06 85.28,11.08 94.82,11.08 94.84,11.06 102.13,3.78 153.07,3.78 157.52,8.23 157.52,14.77 130.67,41.62 124.48,41.62 124.46,41.64 99.77,66.32 92.58,66.32 92.56,66.34 91.74,67.16 91.72,67.18 91.72,67.97 90.07,69.62 18.37,69.62 18.38,69.62 18.38,69.58 18.36,69.56 14.68,65.87 14.68,50.58 14.66,50.56 2.88,38.77 2.88,21.73 14.33,10.28 74.67,10.28 75.06,10.66 75.08,10.68 84.87,10.68
GPIO8  (via drill 0.3)
  Top 0.15: v13.75,40.15 8.62,40.15 R1.1 | v18.5,44.9 18.5,45.65 18.88,46.02 U2.10
  Bottom 0.15: v18.5,44.9 v13.75,40.15
I2C_PW  (via drill 0.3)
  Top 0.15: 155.12,6.53 155.75,6.53 C1.1 | 155.12,6.53 154.38,6.53 C2.1 | v155.12,12.4 154.93,12.6 154.23,12.6 SENSOR2.6 | 155.12,6.53 v155.12,7.15 | v92.62,60.65 93.5,61.52 R1_PINH.2 | v22.25,64.78 21.62,64.15 21.62,63.65 U2.17 21.5,63.9 22,64.4 22,64.9 26,68.9 v28.5,68.9 | v83.87,45.14 83.87,43.65 R2_PINH.2 | v29.5,68.4 46.5,68.4 v50.5,64.4
  Bottom 0.15: v155.12,7.15 v155.12,12.4 154.93,12.6 129.55,12.6 99.5,42.65 85.75,42.65 85.5,42.9 | 83.88,47.4 83.88,51.9 v92.62,60.65 | 83.88,47.4 v83.88,45.15 v83.87,45.14 | v22.25,64.78 22.75,65.28 72.25,65.28 | 85.5,42.9 85.38,43.02 85.38,45.4 85.5,45.52 85.5,45.77 83.88,47.4 | v28.5,68.9 29,68.4 v29.5,68.4 | v50.5,64.4 53.5,61.4 75.5,61.4 86.6,50.3 86.6,45.4 | 86.15,44.15 84.9,42.9 85.5,42.9
  Bottom 0.152: 86.15,44.15 86.15,44.55 86,44.7 86,44.8 86.6,45.4
INT_RTC  (via drill 0.3)
  Top 0.15: v18.12,41.9 16.5,43.52 16.5,46.02 U2.8 | INT_RTC.TP 19.55,7.18 19.55,40.48 v19.25,40.77 | v151.25,5.9 156.5,5.9 157.12,6.53 R1_PINH1.1 | v99.75,41.65 88.97,41.65 | 85,45.62 v85,45.65 84.58,45.65 82.88,47.35 82.88,48.02 U3.3 | v82.5,43.15 v71.62,43.15
  Top 0.152: 85,45.62 88.97,41.65
  Bottom 0.15: v18.12,41.9 v19.25,40.77 26,40.77 28.5,43.27 71.5,43.27 v71.62,43.15 | v151.25,5.9 135.5,5.9 v99.75,41.65 | v85,45.65 v82.5,43.15
IO/BOOT  (via drill 0.3)
  Top 0.15: C6.1 43.75,107.4 43.75,107.65 43.12,108.28 43.12,109.15 43.25,109.28 46.5,109.28 46.88,108.9 BOOT_BUTTON.4 47,108.9 50.38,108.9 BOOT_BUTTON.3 50.5,108.78 51,108.28 v51.5,108.28 | v52.88,106.9 53.12,107.15 53.62,107.15 R_BOOT.1 | v37.75,77.28 24.12,63.65 U2.15
  Bottom 0.15: v51.5,108.28 v52.88,106.9 52.88,105.28 37.75,90.15 v37.75,77.28
IO/CHANGE  (via drill 0.3)
  Top 0.15: v59.88,107.4 60.75,107.4 C10.1 | v59.88,109.15 61.88,109.15 62.12,108.9 CHANGE_BUTTON.4 62.25,108.9 65.62,108.9 CHANGE_BUTTON.3 | R_CHANGE.1 67.5,107.28 v67.5,106.65 67,106.15 61.88,106.15 56.88,101.15 51.12,101.15 14,64.03 14,63.65 U2.23
  Bottom 0.15: v59.88,109.15 v59.88,107.4 60.62,106.65 v67.5,106.65
MISO  (via drill 0.3)
  Top 0.15: 6.88,92.78 5.12,92.78 J4.P7 | 6.88,92.78 14,99.9 MISO.TP | v115.5,3.28 116.25,3.28 R8.1 | v115.5,8.53 116.25,9.28 D12.2 116.25,9.4 116.25,10.4 85.62,41.02 v71.25,41.02 | 52.38,59.9 52.88,59.9 53.25,60.27 53.25,60.52 52,61.77 10.38,61.77 9.62,62.52 | 52.38,59.9 45,59.9 39.25,54.15 39.25,53.9 U1.2 | 9.62,62.52 8.88,63.27 8.88,63.52 U2.27 | 52.38,59.9 v69.5,42.77 | v6.88,92.15 6.88,92.78 | 9.62,62.52 v9.5,62.4
  Bottom 0.15: v115.5,8.53 v115.5,3.28 | v69.5,42.77 v71.25,41.02 | v6.88,92.15 6.88,65.03 v9.5,62.4
MOSI  (via drill 0.3)
  Top 0.15: 83.71,14.57 83.71,14.37 87.67,10.4 107.75,10.4 115.5,2.65 v118.75,2.65 119.12,2.65 119.62,3.15 R7.1 | 83.73,15.48 J1.14 | v118.75,8.53 119.5,9.28 D11.2 | v43.88,48.15 46.88,51.15 U1.5 | U2.7 15.25,46.15 15.25,46.4 17.62,48.77 17.62,49.2 17.62,52.65 v12.25,58.02 | v12.25,81.9 5.88,88.28 5.12,88.28 J4.P3 | v13.25,38.4 13.25,8.4 MOSI.TP | 83.62,14.65 82.62,14.65 v82.38,14.4
  Top 0.152: v43.88,48.15 44.73,47.3 46.98,47.3 v52.88,41.4 | 83.62,14.65 83.63,14.65 | 83.63,14.65 83.73,14.75 83.73,15.48 | 83.71,14.57 83.63,14.65 | v19.5,48.77 18.05,48.77 17.62,49.2
  Bottom 0.15: v118.75,2.65 v118.75,8.53 | 23,48.15 20.12,48.15 v19.5,48.77 | 23,48.15 v43.88,48.15 | v12.25,58.02 v12.25,81.9 | 23,48.15 v13.25,38.4 | v82.38,14.4 79.88,14.4 v52.88,41.4
N$1  (via drill 0.3)
  Top 0.15: C1_BAT1.1 116.25,37.65 116.5,37.65 117.12,37.02 119.5,37.02 122.12,39.65 IC4.3 122.25,39.77 v123,39.77 | D2.1 118,40.02 120.38,40.02 121.88,41.52 122.12,41.52 IC4.1 122.25,41.65 v122.88,42.27 | v138.12,45.9 139.12,45.9 Q1.2
  Bottom 0.15: v138.12,45.9 126.5,45.9 123,42.4 | 123,42.4 v123,39.77 | 123,42.4 v122.88,42.27
N$2  (via drill 0.3)
  Top 0.15: v88,16.4 88,15.65 J1.5 | v67.75,15.53 66.88,16.4 EPD_C2.2
  Bottom 0.15: v88,16.4 86.38,14.78 83.38,14.78 82.5,13.9 69.38,13.9 v67.75,15.53
N$3  (via drill 0.3)
  Top 0.15: v145.88,52.77 142.12,52.77 R2-USB1.2 | v163.5,52.77 163.25,53.02 162.62,53.02 J2.A5
  Bottom 0.15: v163.5,52.77 v145.88,52.77
N$4
  Top 0.15: C7.1 95.38,29.4 95.38,30.02 92.38,33.02 91.12,33.02 90,31.9 84,31.9 L1.2
N$5  (via drill 0.3)
  Top 0.15: v128.25,46.9 123.62,46.9 R1_BAT.2 | v131,48.02 131,48.52 130.88,48.65 MCP73831.1
  Bottom 0.15: v128.25,46.9 129.88,46.9 v131,48.02
N$6
  Top 0.15: CHG_LED.C 123.75,49.52 123.75,48.27 122.38,46.9 R1_BAT.1
N$7
  Top 0.15: 86.62,33.4 86.5,33.27 D4.1 86.62,33.4 | 86.62,33.4 87.12,33.9 90.62,33.9 90.75,33.77 91.75,33.77 C4.1 | 86.62,33.4 83.38,36.65 D3.2
N$8
  Top 0.15: R2_BAT.2 128.75,46.15 128.75,48.15 128.25,48.65 MCP73831.5
N$9
  Top 0.15: C_DELAY.1 52.12,101.78 52.75,102.4 52.75,103.53 52.62,103.65 49.88,103.65 IC1.5
N$10  (via drill 0.3)
  Top 0.15: v84.5,62.27 84.5,60.65 R_CAPACITOR.1 | v85.88,64.78 86.62,64.78 D7.1
  Bottom 0.15: v84.5,62.27 84.5,63.4 v85.88,64.78
N$11
  Top 0.15: J1.4 88.62,15.65 88.62,16.02 89.25,16.65 94.62,16.65 EPD_C1.2
N$12
  Top 0.15: SENSOR2.8 154.12,14.03 153.75,14.03 152.75,13.03 152.75,11.28 153.12,10.9 154.38,10.9 156.75,13.28 157,13.28 SENSOR2.2
N$18  (via drill 0.3)
  Top 0.15: v160.25,56.27 156.5,52.52 155.5,52.52 R2-USB.1 | v163.5,56.27 163.25,56.02 162.62,56.02 J2.B5
  Bottom 0.15: v163.5,56.27 v160.25,56.27
N$19  (via drill 0.3)
  Top 0.15: v81.62,17.77 81.62,15.65 J1.18 | v87.62,23.77 87.88,23.77 88.38,24.27 EPD_C6.2
  Bottom 0.15: v87.62,23.77 v81.62,17.77
N$21  (via drill 0.3)
  Top 0.15: v81.12,18.65 81.12,15.65 J1.19 | v86.12,23.65 86.75,24.27 EPD_C7.2
  Bottom 0.15: v86.12,23.65 v81.12,18.65
N$22  (via drill 0.3)
  Top 0.15: v80.62,19.9 80.62,15.65 J1.20 | v84.38,23.65 85,24.27 EPD_C8.2
  Bottom 0.15: v84.38,23.65 v80.62,19.9
N$23  (via drill 0.3)
  Top 0.15: v79.62,22.15 79.62,15.65 J1.22 | v80.88,23.4 81.62,24.15 EPD_C10.2
  Bottom 0.15: v80.88,23.4 v79.62,22.15
N$25
  Top 0.15: J1.24 78.5,15.65 78.5,21.52 77.5,22.52 77.5,23.4 78.25,24.15 EPD_C12.2
PREVGH  (via drill 0.3)
  Top 0.15: v80.12,21.02 80.12,15.65 J1.21 | EPD_C9.2 v82.75,23.65 | v85.38,28.9 85.75,29.27 86.38,29.27 D5.1
  Bottom 0.15: v80.12,21.02 v82.75,23.65 85.38,26.27 v85.38,28.9
PREVGL  (via drill 0.3)
  Top 0.15: J1.23 79,15.53 79,15.03 78.88,14.9 78.38,14.9 77.12,16.15 77.12,24.27 77.75,24.9 79.25,24.9 79.88,24.27 EPD_C11.2 80,24.27 v80.75,25.02 | v88.88,33.15 89.88,33.15 D4.2
  Bottom 0.15: v80.75,25.02 v88.88,33.15
RESE  (via drill 0.3)
  Top 0.15: v88.25,14.15 89,14.9 89,15.53 J1.3 | v60.88,10.4 59.38,11.9 Q3.2 59.25,11.9 56.25,8.9 54.38,8.9 R3.2
  Bottom 0.15: v88.25,14.15 86.75,14.15 83,10.4 v60.88,10.4
RESE'
  Top 0.15: 54.38,6.53 55.12,5.78 SJ1.2 | 54.38,6.53 53.12,7.78 53.12,8.78 R3.1 | 54.38,6.53 57.25,6.53 R2.2
RESET  (via drill 0.3)
  Top 0.15: IC1.1 46.88,103.53 32.5,103.53 27.5,108.53 R_RESET.1 27.38,108.65 25.88,108.65 25.75,108.78 RESET_BUTTON.3 25.62,108.9 22.25,108.9 RESET_BUTTON.4 22.12,108.78 20.5,108.78 C5.1 20.38,108.65 v19.62,107.9 | v10.12,55.9 10.12,46.15 U2.3
  Bottom 0.15: v10.12,55.9 10.12,98.4 v19.62,107.9
RTC_RST  (via drill 0.3)
  Top 0.15: v22.88,64.78 22.88,63.65 U2.16 | v83.38,49.27 83.38,48.77 84,48.15 U3.4
  Bottom 0.15: v22.88,64.78 22.98,64.88 47.65,64.88 62.12,50.4 82.25,50.4 v83.38,49.27
RX
  Top 0.15: U2.24 12.62,63.65 12.62,66.78 18.12,72.28 RX.TP
SCK  (via drill 0.3)
  Top 0.15: v84.25,16.4 84.12,16.27 84.12,15.65 J1.13 | v121.75,10.15 122.5,9.4 D10.2 | v122,4.03 122.75,3.28 R6.1 | v46,51.65 46.88,52.52 U1.6 67.75,31.77 70.62,31.77 75.88,26.52 v75.88,21.77 | v17.12,49.65 15.74,48.26 14,46.52 14,46.15 U2.6 | v12.75,83.15 5.38,90.53 5.12,90.53 J4.P5 | v8.38,34.15 8.38,7.9 SCK1.TP
  Top 0.152: v12.75,51.27 15.12,48.9 15.6,48.9 15.74,48.76 15.74,48.26
  Bottom 0.15: v122,4.03 122,9.9 v121.75,10.15 115,16.9 87.88,16.9 86.88,15.9 84.75,15.9 v84.25,16.4 81.25,16.4 v75.88,21.77 | v46,51.65 46,51.27 44.38,49.65 19,49.65 | v17.12,49.65 19,49.65 | v12.75,51.27 v12.75,83.15 | v8.38,34.15 19,44.77 19,49.65
SCL  (via drill 0.3)
  Top 0.15: 152.38,11.15 153,10.53 154.5,10.53 155.62,11.65 157,11.65 SENSOR2.4 | J3.4 165.12,20.77 159.75,20.77 152.38,13.4 152.1,13.4 115.62,13.4 v85.88,43.15 85.5,43.15 85.12,43.52 R2_PINH.1 | v102.88,55.27 102.12,55.27 U4.7 | v21.25,65.65 19.5,65.65 17.75,63.9 17.75,63.65 U2.20 | v80.25,62.77 80.25,57.4 U3.16 80.5,57.4 81,57.9 v81,60.9
  Top 0.152: 152.38,11.15 151.7,11.83 151.7,13 152.1,13.4
  Bottom 0.15: 98.62,55.27 v102.88,55.27 | v21.25,65.65 88.25,65.65 88.5,65.4 | 98.62,55.27 88.5,65.4 | v81,60.9 85.5,65.4 88.5,65.4 | 98.62,55.27 98.17,55.27 86.52,43.62 86.35,43.62 v85.88,43.15
SDA  (via drill 0.3)
  Top 0.15: v158,12.53 157.12,12.53 SENSOR2.3 | v164,18.52 164,19.02 164.75,19.77 165.12,19.77 J3.3 | v100.62,57.4 102.12,55.9 U4.8 | v97.12,57.4 96.25,57.4 93.62,60.02 R1_PINH.1 93.5,60.15 92.5,60.15 89.88,62.77 84.38,62.77 81.62,60.02 81.62,57.4 U3.15 | v20.12,65.15 19,64.03 19,63.65 U2.19
  Bottom 0.15: v164,18.52 v158,12.53 155.62,12.53 128.88,39.27 119.5,39.27 101.38,57.4 v100.62,57.4 v97.12,57.4 88.38,66.15 21.12,66.15 v20.12,65.15
SRC  (via drill 0.3)
  Top 0.15: C4.2 91.75,32.4 91.75,31.15 90,29.4 D5.2 89.88,29.27 87.75,29.27 86.88,28.4 82.75,28.4 79.38,31.77 L1.1 79.38,31.9 v76.5,31.9 | v70.12,25.52 58.75,14.15 Q3.3
  Bottom 0.15: v76.5,31.9 v70.12,25.52
SS_SD  (via drill 0.3)
  Top 0.15: v131.62,3.28 132.5,3.28 R10.1 | v131.62,8.53 132.38,9.28 D8.2 | v11.25,54.77 11.25,46.15 U2.4 | v11.25,81.4 5.5,87.15 J4.P2 | v78.25,45.77 69.88,45.77 v36.38,79.28
  Bottom 0.15: v131.62,3.28 v131.62,8.53 131.53,8.62 130.53,8.62 96.88,42.27 81.75,42.27 v78.25,45.77 | v11.25,54.77 v11.25,81.4 11.25,82.28 12.62,83.65 12.88,83.65 17.25,79.28 v36.38,79.28
TX
  Top 0.15: U2.25 11.38,63.65 11.38,69.03 13,70.65 TX.TP
USB_D+  (via drill 0.3)
  Top 0.15: v75.12,60.77 77.62,63.27 88.5,63.27 89.75,64.53 119.25,64.53 126.38,57.4 148.75,57.4 D1.1 | v52.38,60.77 38.75,60.77 24.12,46.15 U2.14
  Bottom 0.15: v52.38,60.77 v75.12,60.77
USB_D-  (via drill 0.3)
  Top 0.15: v147.25,55.52 148.75,55.52 D1.3 | v19.62,51.4 19.62,50.65 22.75,47.52 22.75,46.15 U2.13
  Bottom 0.15: v147.25,55.52 103.75,55.52 92.75,66.53 20.88,66.53 19.62,65.28 v19.62,51.4
VBAT
  Top 0.3: Q1.3 133.65,48.06 131.47,50.24 131.15,50.24 MCP73831.3 129.94,51.45 C2_BAT.1 119.95,63.29 VBAT.TP 101.85,59.55 99.3,57 99.3,55.84 99.68,55.46 100.07,55.46 U4.2 U4.3
VBUS
  Top 0.3: VBUS.TP 108.42,59.21 C1_BAT.1 121.59,50.25 CHG_LED.A 123.38,50.64 MCP73831.4 129.87,48.92 129.87,48.35 132.26,45.96 Q1.1 137.31,45.59 137.8,45.1 149.88,45.1 C5_USB.1 151.04,46.26 C4_USB.1 151.04,54.42 150.45,55.01 150.45,55.84 150.62,56 150.96,56 D1.5 151.7,56 152.04,56 153.66,54.39 153.49,54.21 PFMF.050.1.2 153.24,42.05 132.46,42.05 131.43,43.08 122.42,43.08 121.38,42.03 D2.2 116.25,40.39 R1_PWRUSB.1
VRTC
  Top 0.3: R_CAPACITOR.2 83.82,58.66 83.7,58.66 83.5,58.45 83.5,58.05 U3.14 83.5,56.66 83.5,56.26 92.17,47.58 C8.1 95.35,47.58 C10_SUPERCAP.2
VUSB
  Top 0.3: J2.A9 J2.B4 162.49,56.47 161.87,56.47 161.71,56.3 161.71,52.27 161.94,52.04 J2.B9 J2.A4 162.49,51.67 161.87,51.67 157.99,47.78 PFMF.050.1.1